# EAGLE board RGB_Sensor (EAGLE 7.2.0)
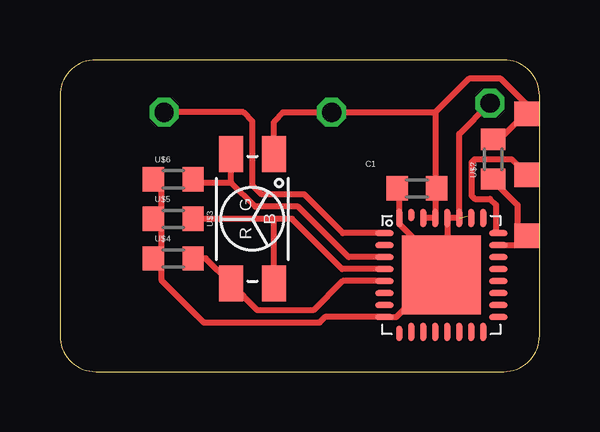
[diagram p0: board, top side]
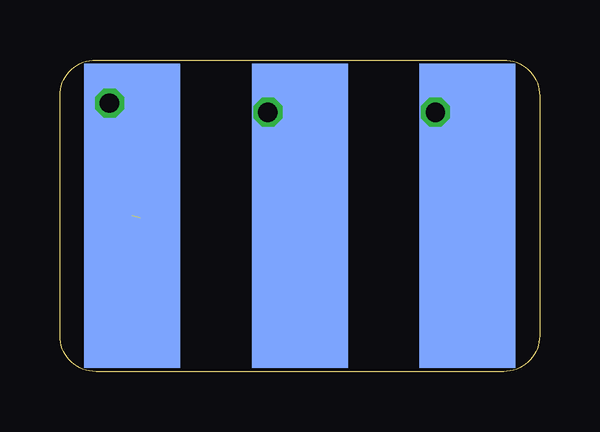
[diagram p1: board, bottom side, seen from below]

Size 20 x 13 mm. Coordinates in mm from the lower left corner, seen from the top.
Copper layers (1*16): Top 0.035mm / dielectric 1.5mm / Bottom 0.035mm
Design rules "Bilex DRU *": minimum track width 10mil, minimum drill 24mil, track to track 10mil, track to pad 10mil, pad to pad 10mil, via to via 10mil, smd to smd 10mil, copper to edge 1mil, drill to drill 8mil, minimum pad ring 10mil, minimum via ring 8mil, stop-mask expansion 4mil, vias tented up to drill 0mil, thermal gap 10mil

## Footprints (pad centres in the part's own frame; a part is rotated, then mirrored left to right if it is on the bottom)
603 = smd 0.889 x 1.016: 1 -0.826,0; 2 0.826,0
CARRIER_SMD2_3POL = smd 4 x 12.7 bottom: GND -6.985,0; RX/TX 6.985,0; VCC 0,0 | smd 1.016 x 1.016: RST -9.461,0.826; TST -9.461,-1.714; VCC'' -9.461,-4.255
RGB_SENSOR = smd 1.5 x 1: C1 -2.7,0.9; C2 2.7,0.9; C3 -2.7,-0.9; C4 2.7,-0.9
QFN32 = smd 0.762 x 0.254: 1 -2.375,1.75; 2 -2.375,1.25; 3 -2.375,0.75; 4 -2.375,0.25; 5 -2.375,-0.25; 6 -2.375,-0.75; 7 -2.375,-1.25; 8 -2.375,-1.75; 17 2.375,-1.75; 18 2.375,-1.25; 19 2.375,-0.75; 20 2.375,-0.25; 21 2.375,0.25; 22 2.375,0.75; 23 2.375,1.25; 24 2.375,1.75 | smd 0.254 x 0.635: 9 -1.75,-2.438 | smd 0.254 x 0.762: 10 -1.25,-2.375; 11 -0.75,-2.375; 12 -0.25,-2.375; 13 0.25,-2.375; 14 0.75,-2.375; 15 1.25,-2.375; 16 1.75,-2.375; 25 1.75,2.375; 26 1.25,2.375; 27 0.75,2.375; 28 0.25,2.375; 29 -0.25,2.375; 30 -0.75,2.375; 32 -1.75,2.375 | smd 0.254 x 0.508: 31 -1.25,2.5 | smd 3.302 x 3.302: TP 0,0

## Placement (x,y rotation side)
C1  100n  [603]  14.89,7.64 180 top
U$1  CARRIER_SMD2SMD2_3POL  [CARRIER_SMD2_3POL]  10,6.5 180 top
U$2  10k  [603]  18.06,8.86 90 top
U$3  RGB_SENSOR  [RGB_SENSOR]  8.03,6.37 90 top
U$4  10k  [603]  4.73,4.72 0 top
U$5  10k  [603]  4.73,6.37 0 top
U$6  10k  [603]  4.73,8.02 0 top
U$10  MSP430G2553  [QFN32]  15.9,4.03 0 top

## Library data of the parts
C1 U$1-U$6 U$10 = thar

## Nets
GND: C1.2 U$1.GND U$4.1 U$5.1 U$6.1 U$10.8 U$10.27 U$10.28 U$10.32 U$10.TP
N$2: U$3.C1 U$4.2 U$10.5
N$3: U$1.TST U$10.24
N$4: U$1.RST U$2.1 U$10.23
N$5: U$3.C3 U$5.2 U$10.4
N$6: U$3.C2 U$6.2 U$10.3
N$12: U$1.RX/TX U$10.1
VCC: C1.1 U$1.VCC U$1.VCC'' U$2.2 U$3.C4 U$10.29 U$10.30

## Tracks (layer width: path | path; a pad name or v marks a point on that pad's centre or on a via)
GND  (via drill 0.8)  (1 unrouted)
  Top 0.254: 16.43,4.35 16.19,5.38 16.16,5.35 | 16.43,4.35 16.48,3.06 U$10.TP 15.01,2.94 14.89,3.14 14.03,2.28 U$10.8 11.05,2.28 10.82,2.05 6,2.05 4.22,3.83 4.22,4.72 | 16.15,4.72 U$10.28 U$10.27 16.65,9.91 v17.93,11.2 | 16.15,4.72 16.15,4.42 16.43,4.35 | 16.15,4.72 15.52,5.35 14.76,5.55 14.15,6.16 U$10.32 14.15,7.49 14.12,7.46 14.12,7.7 C1.2 14.06,7.77 | U$6.1 4.22,8.02 4.22,6.37 | 4.22,6.37 4.22,4.72 | 4.22,4.72 U$4.1 | U$5.1 4.22,6.37
  Bottom 0.254: v17.93,11.2 17.93,6.57 18,6.5
N$2
  Top 0.254: 5.68,4.85 U$4.2 6.08,4.72 U$3.C1 8.24,2.56 10.57,2.56 11.79,3.78 U$10.5
N$3
  Top 0.254: 19.61,7.88 19.46,8.02 19.5,8.18 U$1.TST | U$10.24 18.19,5.78 18.19,6.95 17.93,7.21 17.3,7.21 17.17,7.33 17.17,8.73 17.3,8.86 18.82,8.86 19.43,8.25 U$1.TST | U$1.TST
N$4
  Top 0.254: 19.46,5.48 19.5,5.38 | 19.46,5.48 19.5,5.69 19.08,5.74 19.08,6.95 18.06,7.97 U$2.1 | U$10.23 19.28,5.28 19.46,5.48 | U$1.RST 19.46,5.48
N$5
  Top 0.254: 5.74,6.37 5.62,6.37 5.55,6.18 U$5.2 | 6.11,6.38 5.74,6.37 | 8.93,6.37 9.68,6.37 11.77,4.28 U$10.4 | 5.74,6.37 8.79,6.37 8.93,6.37 | U$3.C3 8.93,6.37
N$6
  Top 0.254: U$10.3 12.03,4.78 9.93,6.88 8.16,6.88 7.14,7.89 | U$6.2 5.68,7.89 7.14,7.89 | 7.14,7.89 7.14,9.06 U$3.C2
N$12  (via drill 0.8)
  Top 0.254: U$10.1 11.79,5.78 10.19,7.39 8.41,7.39 8.03,7.77 8.03,10.43 7.65,10.81 v4.35,10.81
  Bottom 0.254: v4.35,10.81 2.89,8.66 3.01,8.53 U$1.RX/TX
VCC  (via drill 0.8)
  Top 0.254: U$10.29 | 15.65,10.81 15.65,8.02 | 15.65,8.02 U$10.29 | 15.78,7.77 15.71,8.02 | 15.71,8.02 15.65,8.02 | U$10.29 U$10.30 | C1.1 15.71,8.02 | 19.5,10.52 19.46,10.56 | U$2.2 18.12,9.48 19.2,10.56 19.2,10.51 19.46,10.56 | 19.52,10.62 19.65,10.75 19.65,10.95 18.39,12.21 17.05,12.21 15.65,10.81 | 19.52,10.62 19.46,10.56 | 15.65,10.81 v11.33,10.81 9.3,10.81 8.93,10.42 U$3.C4 | U$1.VCC'' 19.46,10.69 19.52,10.62
  Bottom 0.254: U$1.VCC 10,8.85 v11.33,10.81